# Altium PCB Fuse-Board.PcbDoc
Units mil, origin at the board's own origin, x right, y up, seen from the top; angles counter-clockwise.
Board outline 4570 x 1565 mil, 2 copper layers (Top Layer, Bottom Layer); 13 components, 8 nets, 46 pads, 0 vias.
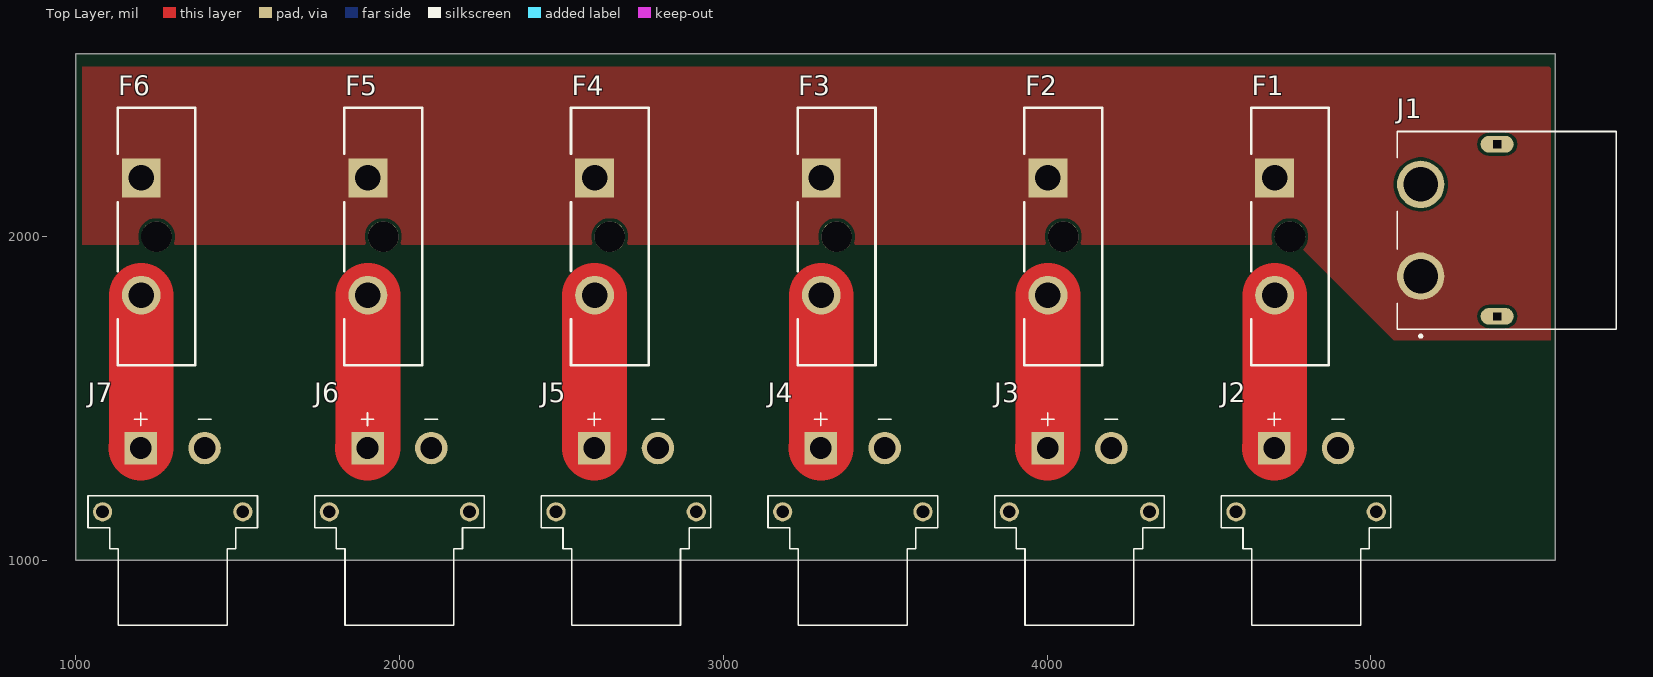
[diagram p0: Top Layer view]
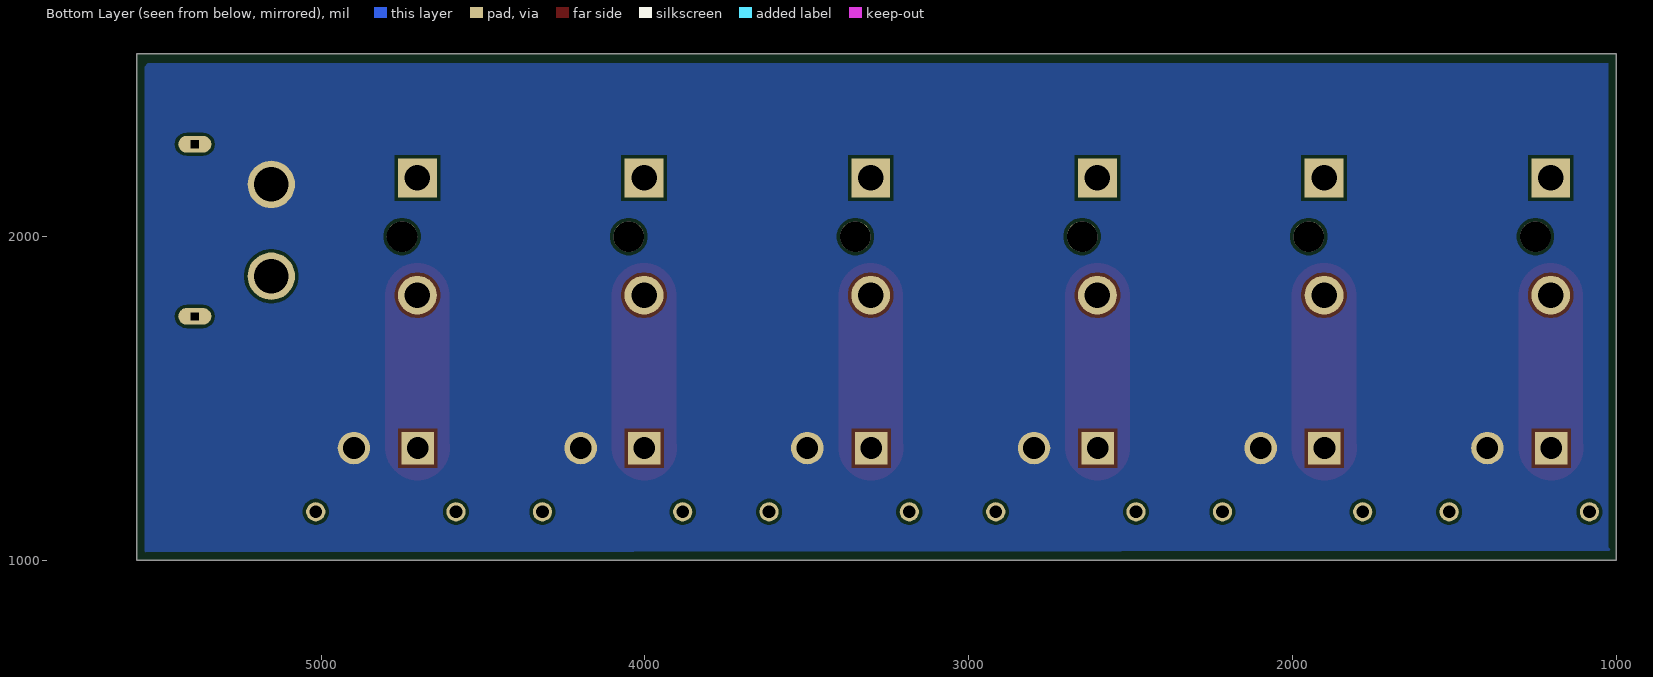
[diagram p1: Bottom Layer view, seen from below]
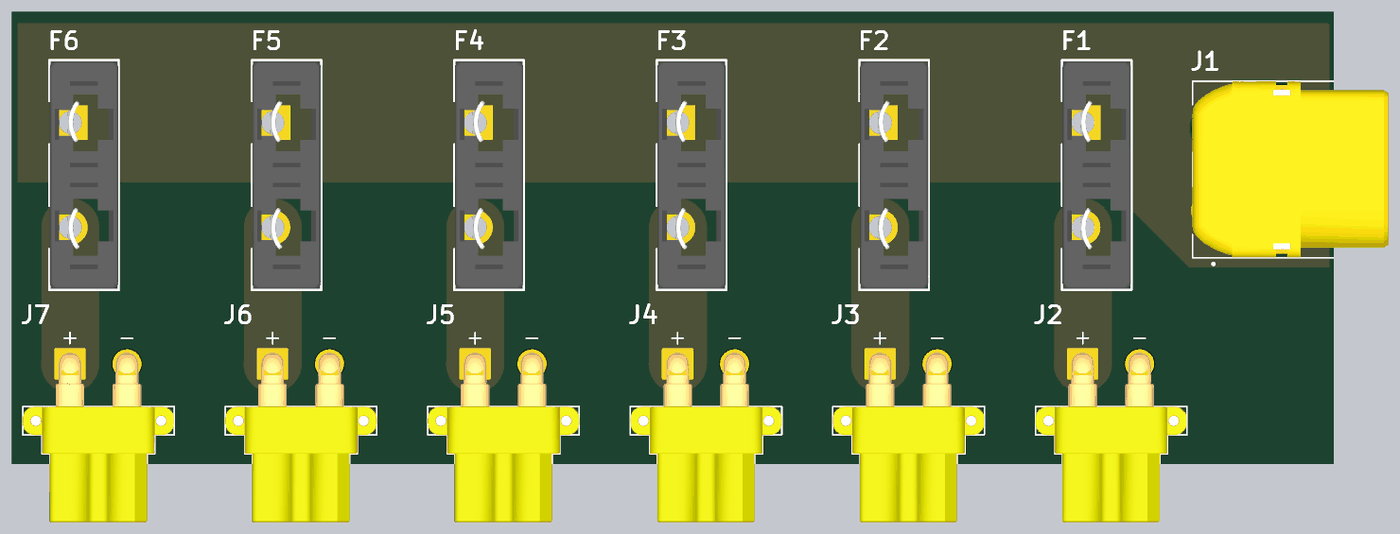
[diagram p2: 3D render of the assembled board from above, using the file's embedded part models]

## Layer stack, top to bottom
Top Solder: solder mask 0.4, Solder Resist, Dk 3.5
Top Layer: signal copper 1.4
Dielectric 1: dielectric 12.6, FR-4, Dk 4.8
Bottom Layer: signal copper 1.4
Bottom Solder: solder mask 0.4, Solder Resist, Dk 3.5

## Board outline
1000,1000 5570,1000 5570,2565 1000,2565

## Design rules (kind name [scope] priority, off if disabled: settings)
Clearance [All] p1: gap=10 ignorepadtopadclearanceinfootprint=FALSE except(0: Arc-Hole Track-Hole SMDPad-Hole THPad-Hole Via-Hole Fill-Hole Poly-Hole Region-Hole Text-Hole)
PolygonConnect PolygonConnect_7 [All vs IsNamedPolygon('NONET_L-01_P-001')] p1: thpad.connectstyle=Direct thpad.reliefconductorwidth=10 thpad.reliefentries=4 thpad.polygonreliefangle="90 Angle" thpad.airgapwidth=10 smdpad.connectstyle=Relief smdpad.reliefconductorwidth=10 smdpad.reliefentries=4 smdpad.polygonreliefangle="90 Angle" smdpad.airgapwidth=10 via.connectstyle=Relief via.reliefconductorwidth=10 via.reliefentries=4 via.polygonreliefangle="90 Angle" via.airgapwidth=10
PolygonConnect PolygonConnect_6 [All vs IsNamedPolygon('NONET_L-01_P-001')] p2: thpad.connectstyle=Direct thpad.reliefconductorwidth=100 thpad.reliefentries=4 thpad.polygonreliefangle="90 Angle" thpad.airgapwidth=10 smdpad.connectstyle=Relief smdpad.reliefconductorwidth=10 smdpad.reliefentries=4 smdpad.polygonreliefangle="90 Angle" smdpad.airgapwidth=10 via.connectstyle=Relief via.reliefconductorwidth=10 via.reliefentries=4 via.polygonreliefangle="90 Angle" via.airgapwidth=10
PolygonConnect PolygonConnect_5 [All vs IsNamedPolygon('NONET_L-01_P-001')] p3: thpad.connectstyle=Relief thpad.reliefconductorwidth=100 thpad.reliefentries=4 thpad.polygonreliefangle="90 Angle" thpad.airgapwidth=0 smdpad.connectstyle=Relief smdpad.reliefconductorwidth=10 smdpad.reliefentries=4 smdpad.polygonreliefangle="90 Angle" smdpad.airgapwidth=10 via.connectstyle=Relief via.reliefconductorwidth=100 via.reliefentries=4 via.polygonreliefangle="90 Angle" via.airgapwidth=10
PolygonConnect PolygonConnect_4 [All vs IsNamedPolygon('NONET_L-01_P-001')] p4: thpad.connectstyle=Relief thpad.reliefconductorwidth=100 thpad.reliefentries=4 thpad.polygonreliefangle="90 Angle" thpad.airgapwidth=10 smdpad.connectstyle=Relief smdpad.reliefconductorwidth=10 smdpad.reliefentries=4 smdpad.polygonreliefangle="90 Angle" smdpad.airgapwidth=10 via.connectstyle=Relief via.reliefconductorwidth=10 via.reliefentries=4 via.polygonreliefangle="90 Angle" via.airgapwidth=10
PolygonConnect PolygonConnect_3 [All vs IsNamedPolygon('NONET_L-01_P-001')] p5: thpad.connectstyle=Relief thpad.reliefconductorwidth=100 thpad.reliefentries=4 thpad.polygonreliefangle="90 Angle" thpad.airgapwidth=10 smdpad.connectstyle=Relief smdpad.reliefconductorwidth=10 smdpad.reliefentries=4 smdpad.polygonreliefangle="90 Angle" smdpad.airgapwidth=10 via.connectstyle=Relief via.reliefconductorwidth=10 via.reliefentries=4 via.polygonreliefangle="90 Angle" via.airgapwidth=10
PolygonConnect PolygonConnect_2 [All vs IsNamedPolygon('NONET_L-01_P-001')] p6: thpad.connectstyle=Relief thpad.reliefconductorwidth=100 thpad.reliefentries=4 thpad.polygonreliefangle="90 Angle" thpad.airgapwidth=10 smdpad.connectstyle=Relief smdpad.reliefconductorwidth=10 smdpad.reliefentries=4 smdpad.polygonreliefangle="90 Angle" smdpad.airgapwidth=10 via.connectstyle=Relief via.reliefconductorwidth=10 via.reliefentries=4 via.polygonreliefangle="90 Angle" via.airgapwidth=10
PolygonConnect PolygonConnect_1 [All vs IsNamedPolygon('NONET_L-01_P-001')] p7: thpad.connectstyle=Relief thpad.reliefconductorwidth=100 thpad.reliefentries=4 thpad.polygonreliefangle="90 Angle" thpad.airgapwidth=10 smdpad.connectstyle=Relief smdpad.reliefconductorwidth=10 smdpad.reliefentries=4 smdpad.polygonreliefangle="90 Angle" smdpad.airgapwidth=10 via.connectstyle=Relief via.reliefconductorwidth=10 via.reliefentries=4 via.polygonreliefangle="90 Angle" via.airgapwidth=10
PolygonConnect [All] p8: connectstyle=Relief reliefconductorwidth=10 reliefentries=4 polygonreliefangle="90 Angle" airgapwidth=10
RoutingVias [All] p1: holewidth=28 width=50 viastyle="Through Hole" minholewidth=28 minwidth=50 maxholewidth=28 maxwidth=50
SolderMaskExpansion [All] p1: expansion=4 istentingtop=FALSE
Width [All] p1: maxlimit=1000 minlimit=50 preferedwidth=300 minimp=50.000000 maximp=50.000000 favimp=50.000000
30 further rules are at their usual default settings.

## Components (designator, comment, footprint, x,y, rotation, side; value= is the part's Value field where it differs from the comment)
F1 "178.6164.0001" FP-178_6164_0001-MFG 4750,2000 r270 top
F2 "178.6164.0001" FP-178_6164_0001-MFG 4050,2000 r270 top
F3 "178.6164.0001" FP-178_6164_0001-MFG 3350,2000 r270 top
F4 "178.6164.0001" FP-178_6164_0001-MFG 2650,2000 r270 top
F5 "178.6164.0001" FP-178_6164_0001-MFG 1950,2000 r270 top
F6 "178.6164.0001" FP-178_6164_0001-MFG 1250,2000 r270 top
J1 "XT60PW-F" AMASS_XT60PW-F 5153.78,2019.25 r90 top
J2 "XT30PW-F" AMASS_XT30PW-F 4800,1150 r180 top
J3 "XT30PW-F" AMASS_XT30PW-F 4100,1150 r180 top
J4 "XT30PW-F" AMASS_XT30PW-F 3400,1150 r180 top
J5 "XT30PW-F" AMASS_XT30PW-F 2700,1150 r180 top
J6 "XT30PW-F" AMASS_XT30PW-F 2000,1150 r180 top
J7 "XT30PW-F" AMASS_XT30PW-F 1300,1150 r180 top

## Footprints (in the part's own frame and the unit in brackets; to place one, negate y for a bottom-side part, rotate by r counter-clockwise, add the part's x,y. Pads: shape width x height; smd on the part's side, far side on the other; paste and mask are expansions set on the pad)
AMASS_XT30PW-F [mm]
  round 2.55 hole 1.7: N(-2.5,-5)
  rect 2.55x2.55 / inner round 2.55 / far side rect 2.55x2.55 hole 1.7: P(2.5,-5)
  round 1.508 hole 1: S1(5.5,0) S2(-5.5,0)
  silkscreen extent -6.65,-7.75 6.65,8.9, body extent -6.65,-6 6.65,8.9, height 5
AMASS_XT60PW-F [mm]
  round 3.716 hole 2.7: 1(-3.6,0) 2(3.6,0)
  oval 1.3x2.6 hole 0.6 square: S1(-6.75,-6) S2(6.75,-6)
  silkscreen extent -8.4,-15.35 7.75,1.85, body extent -7.75,-15.35 7.75,1.85, height 8.4
FP-178_6164_0001-MFG [mm]
  rect 3.05x3.05 hole 2 paste-1000 mask+0: 1(-4.6,-1.2)
  round 3.05 hole 2 paste-1000 mask+0: 2(4.6,-1.2)
  round 2.4 hole 2.4 unplated paste-1000 mask+0: ""(0,0)
  silkscreen extent -10.1,-3.05 10.1,3.05, body extent -10.2,-3.15 10.2,3.15, height 0.25

## Part data
F1 F2 F3 F4 F5 F6: library part CMP-08604-000013-1, "FUSE HOLDER BLADE 80V PCB", Manufacturer="Littelfuse Inc", Package=0, Temperature="to +130°C", Temperature Range High=+130°C, Voltage Rating Ac=80V, Automotive=No, Category=Fuse, ComponentLink2Description=Datasheet, ComponentLink2URL=https://www.littelfuse.com/~/media/commercial-vehicle/datasheets/automotive-fuse-holders/ato/littelfuse-fuse-holder-ato-flr-pcb-datasheet.pdf, Conn Orientation=Vertical, Device Class L1="Circuit Protection", Device Class L2="Fuse Holders", Device Class L3=unset, Digikey Description="FUSE HOLDER BLADE 80V PCB", Height=17.5mm, Lead Free=Yes, Manufacturer Part Number=178.6164.0001, Mouser Description="Fuse Holder HOLDER FOR FLR (ATO) PCB 1-PIN", Number Of Fuses=1, Octopart=https://octopart.com/178.6164.0001-littelfuse-44502275, RoHS=TRUE, Voltage Rating DC=80V
J1: "Socket DC Supply Connector Female", Package=Package, Availability="Not in stock", Check_prices=https://www.snapeda.com/parts/XT60PW-F/AMASS/view-part/?ref=eda, MF=AMASS, MP=XT60PW-F, Price=None, SnapEDA_Link=https://www.snapeda.com/parts/XT60PW-F/AMASS/view-part/?ref=snap
J2 J3 J4 J5 J6 J7: "Socket; DC supply; XT30; female; PIN: 2; on PCBs; THT; yellow; 15A", Package=None, Availability="Not in stock", Check_prices=https://www.snapeda.com/parts/XT30PW-F/AMASS/view-part/?ref=eda, MF=amass, MP=XT30PW-F, Price=None, SnapEDA_Link=https://www.snapeda.com/parts/XT30PW-F/AMASS/view-part/?ref=snap

## Nets (pads, with @x,y where several pads share a name; then routed paths per layer and width w, separated by ;. In a path a pad name is that pad's centre, name@x,y a point inside that pad or via, vN(x,y) a via of type N, cw(c..) or ccw(c..) an arc to the next point about the centre after c; other vN are vias at no path point)
GND: J1.2 J2.N J3.N J4.N J5.N J6.N J7.N
NetF1_1: F1.1 F2.1 F3.1 F4.1 F5.1 F6.1 J1.1
NetF1_2: F1.2 J2.P | length 472.5
  Top Layer w200: J2.P 4702.76,1348.03 F1.2
NetF2_2: F2.2 J3.P | length 472.5
  Top Layer w200: J3.P 4002.76,1348.03 F2.2
NetF3_2: F3.2 J4.P | length 472.5
  Top Layer w200: J4.P 3302.76,1348.03 F3.2
NetF4_2: F4.2 J5.P | length 472.5
  Top Layer w200: J5.P 2602.76,1348.03 F4.2
NetF5_2: F5.2 J6.P | length 472.5
  Top Layer w200: J6.P 1902.76,1348.03 F5.2
NetF6_2: F6.2 J7.P | length 472.5
  Top Layer w200: J7.P 1202.76,1348.03 F6.2
pads on no net: F1. F2. F3. F4. F5. F6. J1.S1 J1.S2 J2.S1 J2.S2 J3.S1 J3.S2 J4.S1 J4.S2 J5.S1 J5.S2 J6.S1 J6.S2 J7.S1 J7.S2

## Polygon pours and split planes (outlines as drawn)
GND on Bottom Layer "NONET_L-01_P-001" (solid, pour order 0): 5545,1025 5545,2525 5535,2535 1025,2535 1025,1040 1015,1030
NetF1_1 on Top Layer "NONET_L-01_P-001" (solid, pour order 1): 1020,1975 1020,2525 5550,2525 5555,2520 5555,1680 5070,1680 4750,2000 4725,1975